# Altium PCB PCB1.PcbDoc
Units mm, origin at the board's own origin, x right, y up, seen from the top; angles counter-clockwise.
Board outline 297.31 x 194.82 mm, 2 copper layers (Top Layer, Bottom Layer); 80 components, 45 nets, 215 pads, 70 vias.
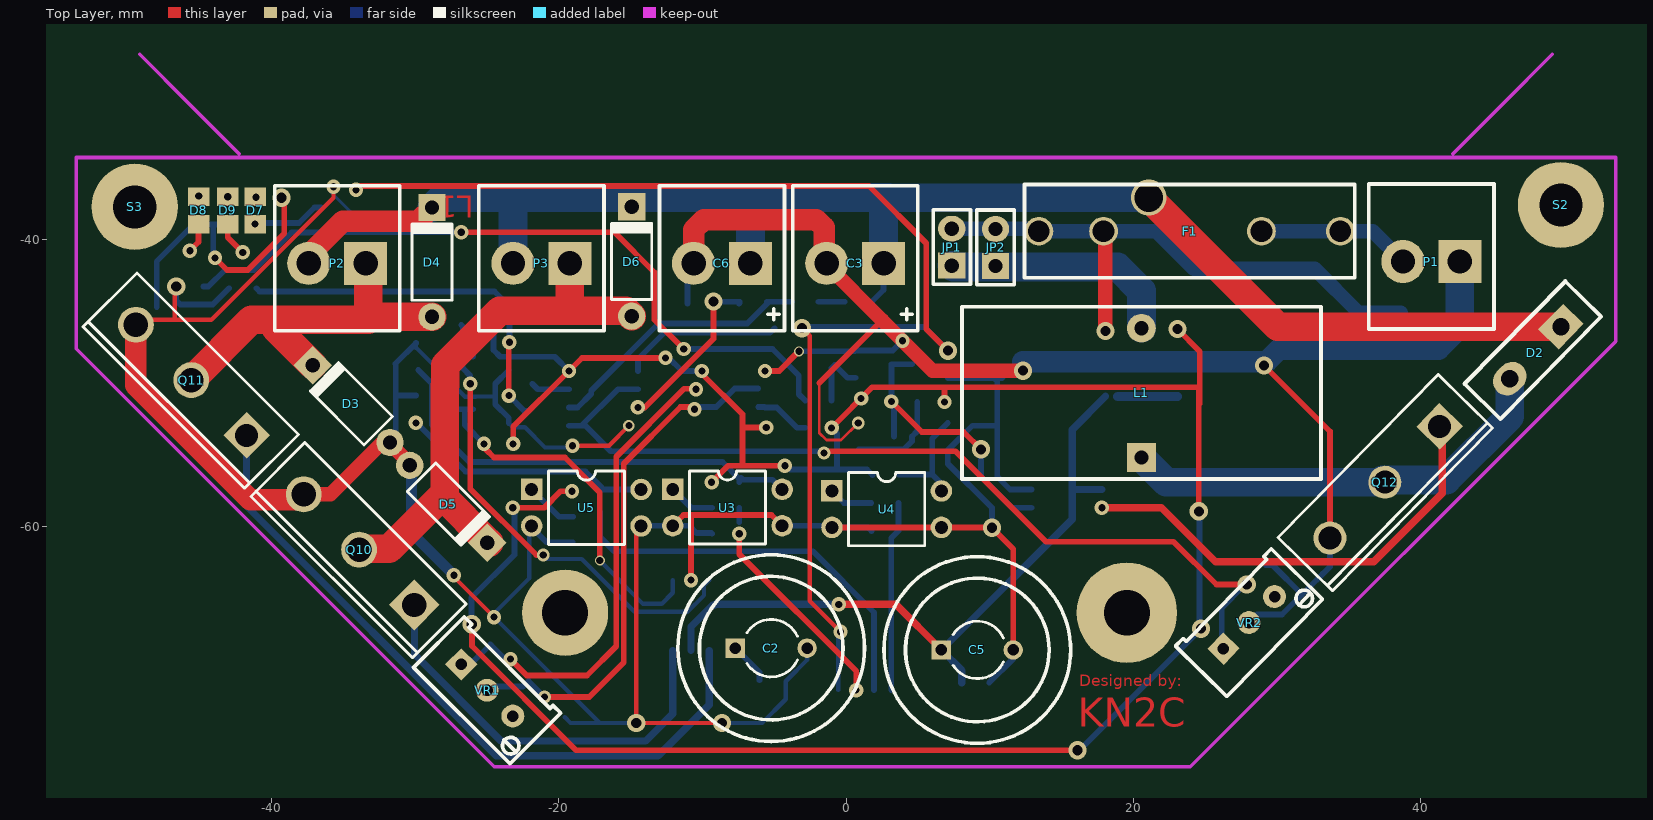
[diagram p0: Top Layer view]
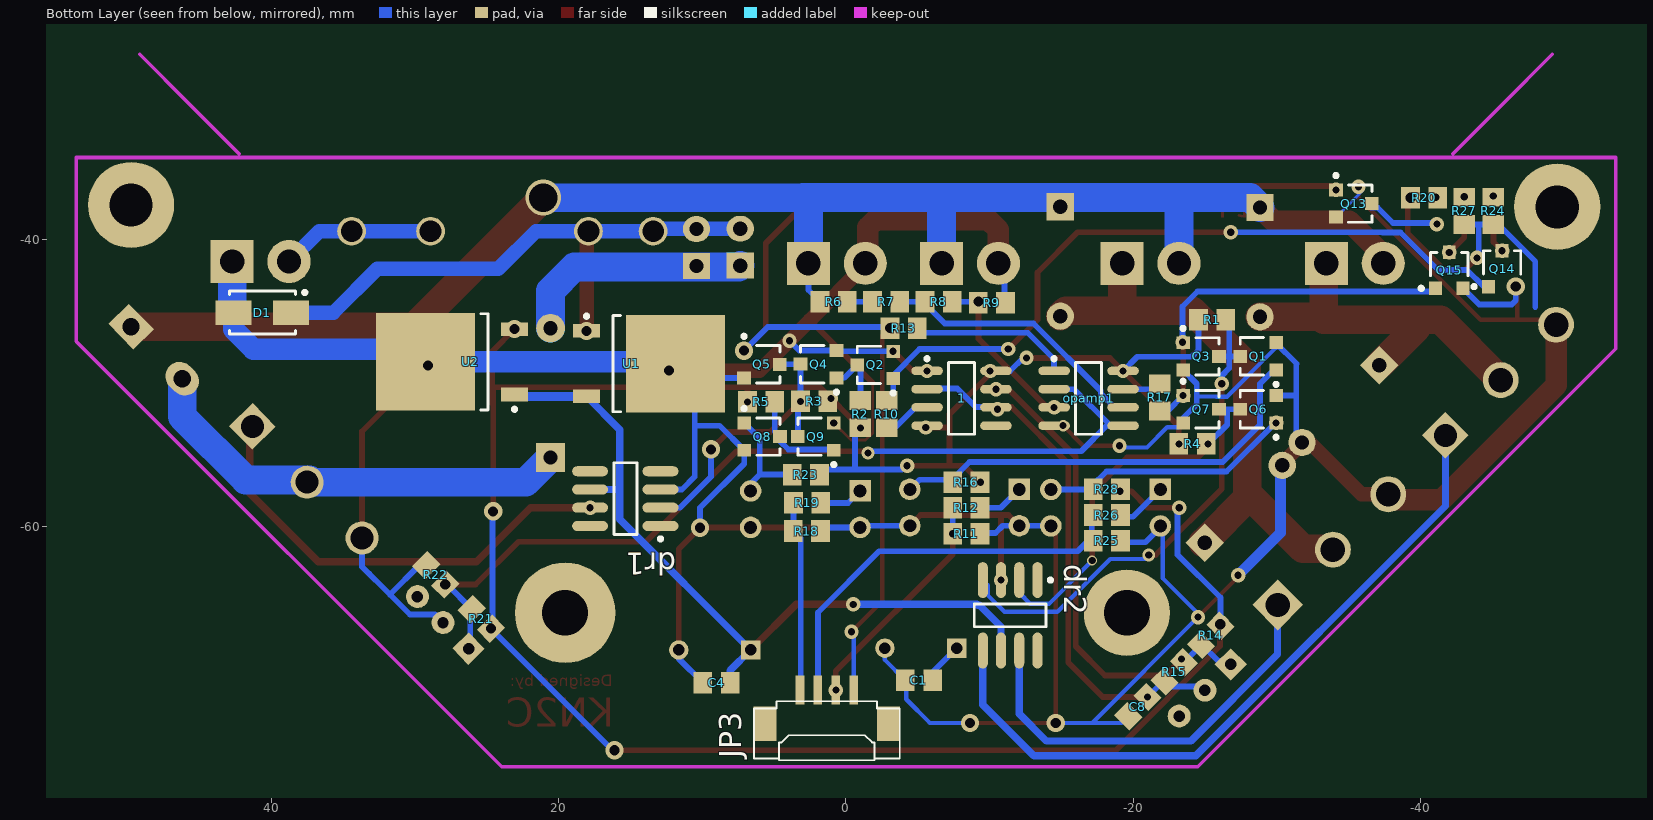
[diagram p1: Bottom Layer view, seen from below]

## Layer stack, top to bottom
Top Layer: signal copper 0.0356
Dielectric: dielectric 0.32, FR-4, Dk 4.8
Bottom Layer: signal copper 0.0356

## Board outline
-204.978,45.593 -200.406,50.165 91.059,50.165 91.059,-140.208 86.614,-144.653 83.947,-141.986 -206.248,-141.986

## Design rules (kind name [scope] priority, off if disabled: settings)
Clearance [All] p1: gap=0.254
FabricationTestpoint [(IsPad And (OnTopLayer Or OnBottomLayer))] p1: side=3 testpointundercomponent=TRUE minsize=1.016 maxsize=2.54 preferedsize=1.524 minholesize=0 maxholesize=1.016 preferedholesize=0.813 testpointgrid=0.025 allowsidetop=TRUE allowsidebottom=TRUE usegrid=TRUE gridtolerance=0
PolygonConnect [All] p1: connectstyle=Relief reliefconductorwidth=0.254 reliefentries=4 polygonreliefangle="90 Angle" airgapwidth=0.254
RoutingVias [All] p1: holewidth=0.711 width=1.27 viastyle="Through Hole" minholewidth=0.5 minwidth=1 maxholewidth=0.711 maxwidth=1.27
SolderMaskExpansion [All] p1: expansion=0.102
Width Width_1 [All] p1: maxlimit=2 minlimit=2539.975 preferedwidth=1 toplayer_minwidth=0 bottomlayer_minwidth=0 minimp=50.000000 maximp=50.000000 favimp=50.000000
27 further rules are at their usual default settings.

## Classes and differential pairs
component class SHOOT1: C1 C2 C3 C4 C5 C6 D1 D2 D3 D4 D5 D6 dr1 dr2 F1 JP1 JP2 JP3 L1 P1 P2 P3 Q1 Q2 Q3 Q4 Q5 Q6 Q7 Q8 Q9 Q10 Q11 Q12 R1 R2 R3 R4 R5 R6 R7 R8 R9 S2 S3 U1 U2
component class SHOOT2: 1 C7 C8 D7 D8 D9 opamp1 Q13 Q14 Q15 R10 R11 R12 R13 R14 R15 R16 R17 R18 R19 R20 R21 R22 R23 R24 R25 R26 R27 R28 U3 U4 U5 VR1 VR2

## Components (designator, comment, footprint, x,y, rotation, side; value= is the part's Value field where it differs from the comment)
1 "555N" "8 pin SOIC_N" -8.044,-51.054 r180 bottom
C1 "Cap_UP" 2012[0805] -5.08,-70.694 r180 bottom
C2 "Cap_El" EL_M -5.207,-68.453 r0 top
C3 "Cap_El_200V" CAP 0.635,-41.656 r270 top
C4 "Cap_UP" 2012[0805] 9.017,-70.866 r180 bottom
C5 "Cap_El" EL_M 9.144,-68.58 r0 top
C6 "Cap_El_200V" CAP -8.636,-41.656 r270 top
C8 "Cap_UP" 2012[0805] -20.32,-72.526 r315 bottom
D1 "Diode" US1M 40.64,-45.085 r180 bottom
D2 "Diode_ShotKey" "TO-220A - duplicate" 48.006,-47.879 r315.48 top
D3 "Diode" DIO10.46-5.3X2.8 -34.447,-51.435 r135 top
D4 "Diode" DIO10.46-5.3X2.8 -28.829,-41.575 r90 top
D5 "Diode" DIO10.46-5.3X2.8 -27.686,-58.42 r315 top
D6 "Diode" DIO10.46-5.3X2.8 -14.924,-41.529 r90 top
D7 "Diode" 2012[0805] -41.148,-37.973 r270 top
D8 "Diode" 2012[0805] -45.085,-37.973 r270 top
D9 "Diode" 2012[0805] -43.053,-37.973 r270 top
dr1 "7667" "8 pin SOIC_M" 15.367,-58.039 r0 bottom
dr2 "7667" "8 pin SOIC_M" -11.43,-66.167 r270 bottom
F1 "Fuse" "fuse new" 35.433,-36.168 r180 top
JP1 "JUMPER" JPR 7.366,-40.513 r90 top
JP2 "JUMPER" JPR 10.414,-40.538 r90 top
JP3 "Header" sucket-smd-4pin 1.27,-73.787 r0 bottom
L1 "Inductor" mh2 20.574,-50.673 r90 top
opamp1 "LM358" "8 pin SOIC_N" -16.891,-51.054 r180 bottom
P1 "Header 2B" BHDR1X2 40.767,-41.529 r270 top
P2 "Header 2B" BHDR1X2 -35.433,-41.656 r270 top
P3 "Header 2B" BHDR1X2 -21.209,-41.656 r270 top
Q1 "2N2222" SOT-23 -28.702,-48.133 r90 bottom
Q2 "2N2222" SOT-23 -2.033,-48.734 r90 bottom
Q3 "2N2222" SOT-23 -24.727,-48.136 r270 bottom
Q4 "2N2222" SOT-23 1.914,-48.679 r90 bottom
Q5 "2N2222" SOT-23 5.851,-48.689 r270 bottom
Q6 "2N2222" SOT-23 -28.702,-51.816 r90 bottom
Q7 "2N2222" SOT-23 -24.727,-51.819 r270 bottom
Q8 "2N2222" SOT-23 5.842,-53.721 r270 bottom
Q9 "2N2222" SOT-23 2.101,-53.721 r90 bottom
Q10 "MOSFET-N" TO247#1 -33.909,-61.595 r135 top
Q11 "MOSFET-N" TO247#2 -45.593,-49.784 r135 top
Q12 "MOSFET-N" TO247#3 37.52,-56.896 r225.48 top
Q13 "2N2222" SOT-23 -35.369,-37.493 r270 bottom
Q14 "2N2222" SOT-23 -45.69,-42.026 r180 bottom
Q15 "2N2222" SOT-23 -42.007,-42.144 r180 bottom
R1 "Res" 2012[0805] -25.493,-45.593 r0 bottom
R2 "Res" 2012[0805] -1.004,-52.163 r270 bottom
R3 "Res" 2012[0805] 2.214,-51.274 r180 bottom
R4 "Res" 2012[0805] -24.13,-54.229 r0 bottom
R5 "Res" 2012[0805] 5.91,-51.308 r0 bottom
R6 "Res" 2012[0805] 0.858,-44.323 r180 bottom
R7 "Res" 2012[0805] -2.794,-44.323 r0 bottom
R8 "Res" 2012[0805] -6.449,-44.323 r0 bottom
R9 "Res" 2012[0805] -10.16,-44.402 r0 bottom
R10 "Res" 2012[0805] -2.837,-52.163 r270 bottom
R11 "Res" 2012[0805] -8.382,-60.492 r180 bottom
R12 "Res" 2012[0805] -8.382,-58.674 r0 bottom
R13 "Res" 2012[0805] -4.011,-46.172 r0 bottom
R14 "Res" 2012[0805] -25.4,-67.564 r135 bottom
R15 "Res" 2012[0805] -22.86,-70.104 r135 bottom
R16 "Res" 2012[0805] -8.382,-56.896 r180 bottom
R17 "Res" 2012[0805] -21.844,-50.989 r90 bottom
R18 "Res" 2012[0805] 2.725,-60.296 r180 bottom
R19 "Res" 2012[0805] 2.704,-58.338 r0 bottom
R20 "Res" 2012[0805] -40.259,-37.084 r0 bottom
R21 "Res" 2012[0805] 25.39,-66.421 r225.48 bottom
R22 "Res" 2012[0805] 28.572,-63.352 r225.48 bottom
R23 "Res" 2012[0805] 2.794,-56.388 r180 bottom
R24 "Res" 2012[0805] -45.085,-37.998 r270 bottom
R25 "Res" 2012[0805] -18.161,-60.96 r180 bottom
R26 "Res" 2012[0805] -18.161,-59.182 r0 bottom
R27 "Res" 2012[0805] -43.053,-37.998 r270 bottom
R28 "Res" 2012[0805] -18.161,-57.404 r180 bottom
S2 "Screw Hole" "Screw Holw 3-6 mm"#1 55.118,-41.021 r180 top
S3 "Screw Hole" "Screw Holw 3-6 mm"#2 -51.308,-39.243 r180 top (schematic designator S2)
U1 "7812" D-PACK 13.716,-48.641 r180 bottom
U2 "7805" D-PACK 27.432,-48.514 r0 bottom
U3 "OptoCoupler" DIP-4 -8.255,-58.661 r270 top
U4 "OptoCoupler" DIP-4 2.831,-58.776 r270 top
U5 "OptoCoupler" DIP-4 -18.077,-58.674 r270 top
VR1 "Res Tap" MULTITURN -24.996,-71.385 r315 top
VR2 "Res Tap" MULTITURN 28.064,-66.675 r45.48 top

## Footprints (in the part's own frame and the unit in brackets; to place one, negate y for a bottom-side part, rotate by r counter-clockwise, add the part's x,y. Pads: shape width x height; smd on the part's side, far side on the other; paste and mask are expansions set on the pad)
"8 pin SOIC_M" [mm] "8-Pin Small Outline Integrated Circuit 1.27 mm Pitch, IPC Low Density"
  oval 2.5x0.7 smd: 1(-2.45,1.905) 2(-2.45,0.635) 3(-2.45,-0.635) 4(-2.45,-1.905) 5(2.45,-1.905) 6(2.45,-0.635) 7(2.45,0.635) 8(2.45,1.905)
  silkscreen extent -2.57,-2.5 0.8,2.93, body extent -2,-2.5 2,2.5, height 1.91
"8 pin SOIC_N" [mm] "8-Pin Small Outline Integrated Circuit 1.27 mm Pitch, IPC Medium Density"
  oval 2.2x0.6 smd: 1(-2.4,1.905) 2(-2.4,0.635) 3(-2.4,-0.635) 4(-2.4,-1.905) 5(2.4,-1.905) 6(2.4,-0.635) 7(2.4,0.635) 8(2.4,1.905)
  silkscreen extent -2.53,-2.5 0.9,2.88, body extent -1.95,-2.45 1.95,2.45, height 1.91
2012[0805] [mm] "Chip Resistor; Body 2.0 x 1.3 mm (LxW typ)"
  rect 1.3x1.5 smd: 1(-0.95,0) 2(0.95,0)
  body extent -1.22,-0.75 1.28,0.75, height 0.5
BHDR1X2 [mm]
  rect 3x3 hole 1.7: 1(0,1.98)
  round 3 hole 1.7: 2(0,-1.98)
  silkscreen extent -5.4,-4.36 4.7,4.36, body extent -5.53,-4.48 4.77,4.47, height 12.5
CAP [mm]
  rect 3x3 hole 1.7: 1(0,1.98)
  round 3 hole 1.7: 2(0,-1.98)
  silkscreen extent -5.4,-4.36 4.7,4.36, body extent -5.53,-4.5 4.82,4.47, height 12.5
D-PACK [mm] "D-PAK, 3-Pads, Body 6.2x6.7mm (max), IPC Medium Density"
  rect 1.9x0.95 smd: 1(-4.35,2.28) 3(-4.35,-2.28)
  rect 6.9x6.8 smd: 4(1.85,0)
  silkscreen extent -4.47,-3.35 -2,3.43, body extent -2.5,-3.35 3.7,3.35, height 2.38
DIO10.46-5.3X2.8 [mm]
  round 1.9 hole 1: 1(-3.81,0)
  rect 1.9x1.9 hole 1: 2(3.81,0)
  silkscreen extent -2.65,-1.4 2.75,1.4, body extent -2.75,-1.5 2.75,1.5, height 3.3
DIP-4 [mm] "DIP; 4 Leads; Row Spacing 7.62 mm; Pitch 2.54 mm"
  rect 1.5x1.5 hole 0.9: 1(-1.27,-3.81)
  round 1.5 hole 0.9: 2(1.27,-3.81) 3(1.27,3.81) 4(-1.27,3.81)
  silkscreen extent -2.55,-2.65 2.55,2.65, body extent -2.65,-2.75 2.68,2.75, height 6.8
EL_M [mm]
  rect 1.35x1.35 hole 0.8: 1(-2.5,0)
  round 1.35 hole 0.8: 2(2.5,0)
  silkscreen extent -6.5,-6.5 6.5,6.5, body extent -6.48,-6.5 6.5,6.5, height 21
"fuse new" [mm]
  round 2 hole 1.5: 0(1,3.25) 1(6.5,3.25) 2(17.5,3.25) 3(22,3.25)
  silkscreen extent 0,0 23,6.5
JPR [mm] "Jumper"
  rect 1.8x1.9 hole 1: 1(-1.3,0)
  oval 1.8x1.9 hole 1: 2(1.27,0)
  silkscreen extent -2.6,-1.3 2.6,1.3, body extent -2.58,-1.3 2.58,1.3, height 9.6
mh2 [mm]
  rect 2x2 hole 1: 1(-4.5,0)
  round 2 hole 1: 2(4.5,0)
  silkscreen extent -6,-12.5 6,12.5, body extent -5.95,-12.45 5.92,12.52, height 4
MULTITURN [mm]
  rect 1.6x1.6 hole 0.8: 1(-2.54,0)
  round 1.6 hole 0.8: 2(0,0) 3(2.54,0)
  silkscreen extent -4.75,-2.5 4.75,2.5, body extent -4.78,-2.5 4.73,2.53, height 4
"Screw Holw 3-6 mm"#1 [mm]
  round 6 hole 3: 0(5.334,-3.429)
"Screw Holw 3-6 mm"#2 [mm]
  round 6 hole 3: 0(-1.778,-1.524)
SOT-23 [mm] "SOT-23; 3 Leads; Body 3.0 x 2.6 mm, inc. leads (LxW max)"
  rect 0.9x0.95 smd: 1(0,1.25) 2(-0.95,-1.25) 3(0.95,-1.25)
  silkscreen extent -2.07,-1.37 1.3,1.25, body extent -1.33,-0.38 1.33,1.25, height 2
sucket-smd-4pin [mm]
  rect 1.6x2.4 smd: 0(-4.238,-0.067) 0(4.362,-0.067)
  rect 0.6x2 smd: 1(-1.813,-2.414) 2(-0.563,-2.414) 3(0.687,-2.414) 4(1.937,-2.414)
  silkscreen extent -5.01,-1.64 5.14,2.48, body extent -5,-2.2 5.15,2.58, height 3.5
TO247#1 [mm] "SIP with Mounting Hole; 3 Leads; Body 20 x 15.6 x 5 mm (typ); Pitch 5.45 mm"
  rect 2.5x2.5 hole 1.7: 1(-5.45,0)
  round 2.5 hole 1.7: 2(0,0) 3(5.45,0)
  silkscreen extent -7.95,-2.6 7.95,2.7
TO247#2 [mm] "SIP with Mounting Hole; 3 Leads; Body 20 x 15.6 x 5 mm (typ); Pitch 5.45 mm"
  rect 2.3x2.3 hole 1.6: 1(-5.45,0)
  round 2.5 hole 1.7: 2(0,0) 3(5.45,0)
  silkscreen extent -7.95,-2.6 7.95,2.7
TO247#3 [mm] "SIP with Mounting Hole; 3 Leads; Body 20 x 15.6 x 5 mm (typ); Pitch 5.45 mm"
  rect 2.3x2.3 hole 1.6: 1(-5.45,0)
  round 2.3 hole 1.6: 2(0,0) 3(5.45,0)
  silkscreen extent -7.95,-2.6 7.95,2.7
"TO-220A - duplicate" [mm]
  rect 2x2.5 hole 1.2: 1(0,2.54)
  oval 2x2.5 hole 1.2: 2(0,-2.54)
  silkscreen extent -2,-5 1.5,5
US1M [mm] "Molded Diode, 2-Leads, Body 4.3x2.6mm, IPC Medium Density"
  rect 2.5x1.7 smd: 1(-2,0) 2(2,0)
  silkscreen extent -2.3,-1.5 3.07,1.52, body extent -2.3,-1.46 2.3,1.46, height 2.3

## Part data
1 opamp1: library part 7667, "Dual MOSFET Driver"
C1 C2 C3 C4 C5 C6 C8: "Capacitor"
D1 D2 D3 D4 D5 D6 D7 D8 D9: "1 Amp General Purpose Rectifier"
dr1 dr2: "Dual MOSFET Driver"
JP3: library part "Header 4", "Header, 4-Pin"
Q1 Q2 Q3 Q4 Q5 Q6 Q7 Q8 Q9 Q13 Q14 Q15: "NPN Bipolar Transistor"
Q10 Q11 Q12: "N-Channel MOSFET"
R1 R2 R3 R4 R5 R6 R7 R8 R9 R10 R11 R12 R13 R14 R15 R16 R17 R18 R19 R20 R21 R22 R23 R24 R25 R26 R27 R28: "Semiconductor Resistor"
U3 U4 U5: library part TLP521
VR1 VR2: "Tapped Resistor"

## Free pads (board coordinates)
  round 7 hole 3.2: 1(19.558,-65.989)
  round 6 hole 3.2: 2(-19.558,-65.989)

## Via types
v1: diameter 1, hole 0.5, Top Layer to Bottom Layer, 44 vias
v2: diameter 1.27, hole 0.7, Top Layer to Bottom Layer, 12 vias
v3: diameter 1.27, hole 0.711, Top Layer to Bottom Layer, 6 vias
v4: diameter 0.9, hole 0.5, Top Layer to Bottom Layer, 4 vias
v5: diameter 0.7, hole 0.5, Top Layer to Bottom Layer, 2 vias
v6: diameter 0.8, hole 0.5, Top Layer to Bottom Layer, 1 vias
v7: diameter 2.5, hole 2, Top Layer to Bottom Layer, 1 vias

## Nets (pads, with @x,y where several pads share a name; then routed paths per layer and width w, separated by ;. In a path a pad name is that pad's centre, name@x,y a point inside that pad or via, vN(x,y) a via of type N, cw(c..) or ccw(c..) an arc to the next point about the centre after c; other vN are vias at no path point)
+12: C4.2 C5.1 dr1.6 dr2.6 U1.3 U2.1 | length 52.5
  Top Layer w0.508: v1(-0.508,-65.405) 3.469,-65.405 C5.1
  Bottom Layer w0.508: dr2.6 -10.795,-66.967 -9.303,-65.475 -9.17,-65.475 -9.1,-65.405 v1(-0.508,-65.405) ; C4.2 8.067,-70.003 C5.1 15.748,-59.476 15.748,-57.404 ; dr1.6 15.748,-57.404 ; U1.3 15.748,-53.239 15.748,-57.404
  Bottom Layer w0.635: U1.3@18.923,-50.921 U2.1@23.082,-50.921
"D1- IN": dr1.2 Q4.1 Q5.1 Q9.1 R3.1 | length 20.5
  Top Layer w0.4: v1(3.164,-51.274) 5.283,-53.393 8.181,-53.393 v2(9.398,-54.61)
  Bottom Layer w0.4: v1(3.164,-51.274) 3.351,-51.461 Q9.1 ; R3.1@3.164,-51.274 Q4.1 3.175,-48.689 Q5.1 ; v2(9.398,-54.61) 9.398,-56.515 11.557,-58.674 dr1.2
D1-OUT: dr1.7 Q12.1 | length 32
  Top Layer w0.508: v1(17.817,-58.674) 21.971,-58.674 25.737,-62.44 36.747,-62.44 41.529,-57.658 41.529,-53.198 Q12.1
"D2- IN": dr2.4 Q1.1 Q3.1 R1.1 | length 34.6
  Top Layer w0.4: v1(-26.162,-50.038) -26.162,-57.371 -21.557,-61.976 v4(-21.082,-61.976)
  Bottom Layer w0.3: v4@-21.049,-62.23 -21.038,-62.241 -18.404,-62.241 -14.72,-65.925 -11.037,-65.925 -9.891,-64.779 -9.891,-64.083 dr2.4
  Bottom Layer w0.4: Q1.1 -27.449,-48.136 -26.688,-48.136 ; R1.1@-26.797,-45.947 -26.688,-46.055 -26.688,-48.068 ; v1(-26.162,-50.038) -26.162,-49.48 -26.688,-48.954 -26.688,-48.136 ; Q3.1 -26.62,-48.136 -26.688,-48.068 ; -26.688,-48.136 -26.688,-48.068
D2-OUT: dr2.5 Q11.1 | length 49.6
  Bottom Layer w0.5: Q11.1 -41.739,-58.563 -24.357,-75.946 -13.081,-75.946 -9.525,-72.39 dr2.5
"D3- IN": dr2.2 Q6.1 Q7.1 R4.1 | length 25.9
  Top Layer w0.4: v1@-25.08,-54.61 -24.507,-55.183 -19.572,-55.183 -17.145,-57.61 v5(-17.145,-62.357)
  Bottom Layer w0.3: v5(-17.145,-62.357) -14.131,-65.371 -12.834,-65.371 -12.065,-64.602 dr2.2 ; v5@-17.018,-62.48 v5@-17.017,-62.48
  Bottom Layer w0.4: Q6.1 -25.98,-51.816 Q7.1 ; -26.543,-51.816 -26.543,-52.893 v1(-25.207,-54.229)
D3-OUT: dr2.7 Q10.1 | length 29.1
  Bottom Layer w0.5: Q10.1 -30.055,-68.878 -24.003,-74.93 -13.97,-74.93 -12.065,-73.025 dr2.7
GND: 1.1 C1.1 C2.2 C3.2 C4.1 C5.2 C6.2 C8.2 D1.1 D3.1 D5.1 dr1.3 dr2.3 opamp1.4 P1.1 Q1.3 Q2.3 Q3.3 Q4.3 Q5.3 Q6.3 Q7.3 Q8.3 Q9.3 Q10.3 Q11.3 Q12.3 Q13.3 Q14.3 Q15.3 R9.1 R11.2 R18.2 R22.1 R25.2 U1.4 U2.4 U3.2 U3.3 U4.2 U4.3 U5.2 U5.3 VR2.2 | length 353.1
  Top Layer w0.2: -1.858,-49.991 -1.858,-53.467 -1.358,-53.967 -0.346,-53.967 v4(0.851,-52.771)
  Top Layer w0.3: Q11.3 -49.109,-45.593 -46.736,-45.593 ; v3(-46.64,-43.276) -46.736,-43.372 -46.736,-45.593 ; v1(-35.687,-36.322) -35.687,-37.084 -44.196,-45.593 -46.736,-45.593 ; v1@-27.368,-63.436 v1(-24.511,-66.294) ; v1(-19.05,-54.356) -16.51,-54.356 v6(-15.113,-52.959) ; U5.3 -14.605,-60.282 v3(-14.605,-73.66) v3(-8.636,-73.66)
  Top Layer w0.4: U3.2 -11.315,-59.182 -5.194,-59.182 U3.3 ; v1(-10.795,-63.717) -10.795,-59.182 ; v1(-5.644,-49.149) -4.648,-49.149 v5(-3.283,-47.784) ; -1.858,-49.991 2.513,-45.62 ; U4.2 U4.3 ; U4.3@6.006,-60.046 U4.3 ; C5.2 11.644,-61.555 v2(10.16,-60.071) 10.033,-60.071 10.008,-60.046 U4.3 ; v2(29.109,-48.768) 33.698,-53.358 Q12.3
  Top Layer w1: Q10.3 -35.897,-57.741 -32.285,-54.129 D3.1 ; D3.1@-31.753,-54.213 D5.1@-30.253,-55.713 ; C3.2 -1.345,-41.762 2.513,-45.62 v1(3.937,-47.044) 6.021,-49.128 v2(12.319,-49.128)
  Top Layer w1.5: Q11.3 -49.447,-50.149 -41.479,-58.116 -38.138,-58.116 Q10.3 ; C6.2 -10.616,-39.323 -9.901,-38.608 -2.076,-38.608 -1.524,-39.16 -1.524,-41.477 C3.2
  Bottom Layer w0.2: v1@-35.964,-36.599 Q13.3
  Bottom Layer w0.3: Q1.3 -29.952,-47.526 -26.536,-50.942 -25.788,-50.942 -25.773,-50.927 -24.431,-50.927 ; v1(-24.511,-66.294) -17.145,-73.66 v3(-14.605,-73.66) -19.186,-73.66 C8.2@-19.578,-73.267 ; v1@-24.511,-66.04 -22.065,-63.594 U5.2@-22.065,-59.863 ; Q7.3 -23.171,-53.075 -22.363,-53.075 -20.955,-54.483 v1@-19.05,-54.483 ; v3@-8.414,-73.66 -5.842,-73.66 -4.191,-72.009 -4.191,-70.755 C1.1 -2.707,-69.271 C2.2
  Bottom Layer w0.4: v3(-46.64,-43.276) -46.64,-44.251 -46.361,-44.53 -44.093,-44.53 Q15.3 ; D3.1 -31.353,-53.729 -31.353,-48.657 -31.369,-48.64 -29.952,-47.223 Q1.3 ; -31.353,-50.8 -31.287,-50.866 Q6.3 ; Q7.3 -23.477,-52.436 -24.431,-51.482 -24.431,-50.927 -24.431,-50.04 Q3.3 ; U5.2@-22.065,-59.863 -20.841,-61.087 R25.2@-19.027,-61.087 ; U5.3 -14.254,-59.931 U3.2 -10.922,-59.931 -10.414,-60.44 -9.384,-60.44 R11.2 ; R9.1@-11.04,-44.45 -11.04,-42.08 C6.2 ; U3.3 -1.729,-59.931 ; v5(-3.283,-47.784) Q4.3@0.609,-47.784 ; U4.2@-1.094,-59.931 U4.2 1.525,-60.046 R18.2 ; Q4.3 3.252,-47.729 v1(3.937,-47.044) ; U4.3@6.641,-60.489 U4.3 ; Q5.3 U1.4@10.287,-49.639 ; C4.1 11.644,-69.189 C5.2 ; v2(10.16,-60.071) 10.16,-58.674 7.092,-55.606 Q8.3 8.804,-52.959 10.541,-52.959 ; U1.4 10.868,-49.639 U1.4@10.287,-49.639 ; dr1.3 11.43,-57.404 10.541,-56.515 10.541,-52.959 ; VR2.2 28.621,-66.118 30.364,-66.118 31.765,-64.717 ; R22.1 29.722,-62.674 31.765,-64.717 ; 33.221,-63.246 33.698,-62.769 ; Q12.3 33.698,-62.769 ; D1.1 D1.1@42.747,-44.978 ; U1.4@10.287,-49.639 10.541,-49.893 10.541,-52.959 ; 31.765,-64.717 33.698,-62.784 33.698,-62.769
  Bottom Layer w0.75: D5.1@-30.253,-55.713 -30.253,-60.425 v1(-27.305,-63.373)
  Bottom Layer w1.5: U1.4@12.319,-48.514 U2.4@29.109,-48.514 ; U2.4 30.171,-47.625 41.276,-47.625 42.64,-46.261 D1.1
  Bottom Layer w2: D1.1@42.747,-44.978 P1.1
"IN AB": opamp1.2 opamp1.5 R21.1 R22.2 VR2.1 | length 62.5
  Top Layer w0.4: v4(-1.524,-54.864) -1.651,-54.737 7.62,-54.737 13.922,-61.039 22.812,-61.039 25.802,-64.029 v2(27.906,-64.029)
  Bottom Layer w0.4: opamp1.5 opamp1.5@-18.415,-52.959 ; opamp1.2 -15.875,-50.419 opamp1.5@-18.415,-52.959 ; v4(-1.524,-54.864) -1.651,-54.737 -16.383,-54.737 -18.161,-52.959 opamp1.5@-18.415,-52.959 ; VR2.1 26.169,-68.372 26.169,-65.856 R21.1 27.771,-64.029 v2(27.906,-64.029)
"MICRO 1": JP3.4 R18.1 R19.2 | length 13.2
  Bottom Layer w0.4: JP3.4@3.145,-71.36 3.145,-60.783 3.654,-60.275 R19.2
"MICRO 2": JP3.2 R11.1 R12.2 | length 15.3
  Top Layer w0.4: v1(-7.432,-60.492) -7.432,-61.91 0.707,-70.049 v1(0.707,-71.373)
  Bottom Layer w0.4: -7.432,-59.694 R12.2
"MICRO 3": JP3.3 R25.1 R26.2 | length 28.4
  Bottom Layer w0.4: R26.2@-17.106,-58.973 -17.106,-59.309 -17.106,-60.738 -16.133,-61.711 -2.297,-61.711 1.957,-65.965 JP3.3
Net1_3: 1.3 R10.2 | length 3.9
  Bottom Layer w0.4: 1.3@-6.109,-51.666 -5.667,-51.666 1.3 -4.826,-51.689 -3.402,-53.113 R10.2
Net1_7: 1.7 R14.1 R15.2 VR1.1 | length 33.6
  Top Layer w0.4: v1(-23.368,-69.215) -23.241,-69.088 -23.26,-69.069 -23.133,-69.069 -23.324,-69.259 -22.225,-70.358 -18.034,-70.358 -16.002,-68.326 -16.002,-55.118 -11.28,-50.396 v1@-10.715,-50.396
  Bottom Layer w0.4: VR1.1@-26.411,-69.335 -25.901,-69.335 R14.1@-24.765,-68.199 ; R14.1 -23.876,-69.088 R15.2@-23.241,-69.088
  other v1: -10.444,-50.419
NetC3_1: C3.1 C6.1 D2.1 D4.2 D6.2 P2.2 P3.2 R6.1 | length 110.4
  Top Layer w1.5: P2.2@-37.309,-41.99 -37.309,-40.992 -35.052,-38.735 -29.799,-38.735 D4.2
  Top Layer w2: v7(21.082,-37.084) 30.066,-46.068 D2.1
  Bottom Layer w0.4: R6.1 2.615,-43.516 C3.1
  Bottom Layer w2: D4.2 -28.132,-37.068 -23.241,-37.068 ; P3.2 -23.189,-37.12 -23.241,-37.068 ; C6.1 -6.656,-37.068 ; C3.1 2.615,-37.437 2.968,-37.084 ; v7(21.082,-37.084) 2.968,-37.084 ; -23.241,-37.068 -6.656,-37.068 ; -6.656,-37.068 2.984,-37.068 2.968,-37.084
NetD2_2: D2.2 L1.1 Q12.2 | length 31.2
  Bottom Layer w2: L1.1 22.297,-56.896 Q12.2 37.361,-56.737 41.815,-56.737 46.225,-52.327 D2.2
NetD3_2: D3.2 D4.1 P2.1 Q11.2 | length 26.1
  Top Layer w2: Q11.2 -41.402,-45.593 -33.274,-45.593 -33.274,-45.385 ; -39.71,-46.172 D3.2 ; P2.1@-33.349,-41.99 P2.1@-33.17,-42.169 ; P2.1@-33.274,-41.835 -33.274,-45.385 ; D4.1 -33.274,-45.385
NetD5_2: D5.2 D6.1 P3.1 Q10.2 | length 39.9
  Top Layer w2: Q10.2 -33.852,-61.538 -31.82,-61.538 -28.124,-57.842 D5.2@-24.865,-61.101 ; -27.94,-58.026 -27.94,-50.165 -27.916,-50.141 -27.916,-48.751 -24.115,-44.95 -19.103,-44.95 ; P3.1 -19.229,-44.824 -19.103,-44.95 ; D6.1 -15.313,-44.95 -19.103,-44.95
  Bottom Layer w1.5: P3.1 P3.1@-18.607,-41.656
NetD7_1: D7.1 R20.1
  other v1: -41.082,-37.059
NetD7_2: D7.2 Q13.1 | length 5.1
  Bottom Layer w0.4: v1(-41.148,-38.923) -41.046,-38.923 -40.974,-38.851 -38.089,-38.851 -37.012,-37.774 Q13.1@-36.567,-37.774
NetD8_1: D8.1 R24.1
  other v1: -45.067,-36.957
NetD8_2: D8.2 Q14.1 | length 2.3
  Top Layer w0.4: v1(-45.69,-40.776) -45.085,-40.171 D8.2
  Bottom Layer w0.3: v1(-45.69,-40.776) Q14.1@-45.69,-40.549
NetD9_1: D9.1 R27.1
  other v1: -43.053,-37.023
NetD9_2: D9.2 Q15.1 | length 2.4
  Top Layer w0.4: D9.2 -43.053,-39.848 v1(-42.007,-40.894)
NetF1_1: F1.0 F1.1 P1.2 | length 10.7
  Bottom Layer w1: F1.1 F1.0 36.676,-39.418 P1.2
NetJP1_1: JP1.1 JP2.1 L1.2 | length 16.5
  Bottom Layer w2: JP1.1 7.463,-41.91 18.923,-41.91 20.574,-43.561 L1.2
Netopamp1_1: opamp1.1 R13.1 | length 11.2
  Bottom Layer w0.4: opamp1.1 -14.491,-48.325 -12.665,-46.499 -5.287,-46.499 R13.1
Netopamp1_7: opamp1.7 R17.2 | length 2.7
  Bottom Layer w0.4: R17.2 -21.464,-50.419 opamp1.7
NetQ2_1: Q2.1 Q4.2 R2.1 | length 4.4
  Bottom Layer w0.4: R2.1 -1.004,-48.955 Q2.1 0.112,-49.629 Q4.2
NetQ8_1: Q8.1 Q9.2 R5.1 | length 6.9
  Bottom Layer w0.4: Q9.2 0.897,-54.625 4.014,-54.625 4.592,-54.047 Q8.1 4.96,-53.353 R5.1
NetR6_2: R6.2 R7.2 | length 1.8
  Bottom Layer w0.4: R7.2@-1.913,-44.323 R6.2
NetR12_1: R12.1 U3.1 | length 3.3
  Bottom Layer w0.4: U3.1 -10.782,-58.674 R12.1
NetR19_1: R19.1 U4.1 | length 3.1
  Bottom Layer w0.4: U4.1 -0.148,-58.338 R19.1
NetR26_1: R26.1 U5.1 | length 3.7
  Bottom Layer w0.4: U5.1 -19.982,-59.309 R26.1@-19,-59.309
OPAMP-IN1: opamp1.3 R8.1 R9.2 | length 11.7
  Top Layer w0.4: v1(-14.491,-51.689) -14.018,-51.689 -9.233,-46.904 v2(-9.233,-44.323)
  Bottom Layer w0.4: R9.2 -9.131,-44.323 R8.1 ; R8.1@-7.443,-44.45 R8.1@-7.403,-44.41
OPAMP-IN2: opamp1.6 R7.1 R8.2 | length 18.8
  Bottom Layer w0.4: opamp1.6 -18.695,-51.689 -17.737,-50.731 -17.737,-50.529 -13.053,-45.845 -6.879,-45.845 -5.499,-44.465 R8.2 R7.1
OPAMP-OUT1: JP3.1 Q5.2 Q13.2 R13.2 | length 86.8
  Top Layer w0.3: v2(-3.061,-46.172) -2.529,-46.704 -2.529,-65.162 v1(-0.381,-67.31)
  Top Layer w0.4: v1@-34.224,-36.268 1.597,-36.268 5.588,-40.259 5.588,-46.226 v2(7.101,-47.739)
  Bottom Layer w0.3: JP3.1 -0.543,-67.472 v1(-0.381,-67.31)
  Bottom Layer w0.4: v2(-3.061,-46.172) -2.979,-46.09 5.452,-46.09 v2(7.101,-47.739)
  other v1: -34.119,-36.543
OPAMP-OUT2: Q3.2 Q7.2 Q15.2 R17.1 | length 27.2
  Top Layer w0.4: v1(-23.477,-50.869) -23.477,-47.253 -23.439,-47.215 v1(-23.439,-47.148)
  Bottom Layer w0.4: Q15.2 -40.841,-43.61 -24.484,-43.61 -23.439,-44.655 Q3.2@-23.439,-47.402 ; Q7.2@-23.477,-50.653 v1(-23.477,-50.869) -22.407,-51.939 -22.098,-51.939 R17.1@-21.844,-51.685 ; Q3.2@-23.439,-47.215 -23.477,-47.253 Q3.2 v1(-23.439,-47.148)
PIN6: 1.2 1.6 C8.1 R15.1 VR1.2 | length 37.3
  Top Layer w0.4: v4(-20.992,-71.854) -17.879,-71.854 -15.475,-69.45 -15.475,-55.607 -11.534,-51.666 -10.702,-51.666 v1(-10.552,-51.816)
  Bottom Layer w0.4: VR1.2@-24.615,-71.131 -22.494,-71.131 -22.1,-70.737 -20.918,-71.919 C8.1@-20.751,-71.753 ; v1(-10.552,-51.816) -10.759,-51.816 -10.909,-51.666 -9.034,-51.666 -7.747,-50.379 1.2@-6.126,-50.379
"PULS 555": Q2.2 Q14.2 R10.1 | length 51.7
  Top Layer w0.4: v1(-26.797,-39.497) -16.129,-39.497 -13.335,-42.291 -13.335,-45.593 -11.367,-47.561 -10.986,-47.561 -11.049,-47.625 v1(-11.303,-47.625)
  Bottom Layer w0.4: Q14.2 -44.406,-43.276 -43.247,-42.117 -41.228,-42.117 -38.616,-39.505 -37.373,-39.505 -37.365,-39.497 v1(-26.797,-39.497) ; v1(-11.303,-47.625) -5.124,-47.625 -3.283,-49.466 Q2.2 -3.283,-50.767 R10.1
"PULS OPTO 1": Q8.2 R23.1 U4.4 | length 8.5
  Bottom Layer w0.4: R23.1@3.654,-56.358 6.006,-56.358 ; U4.4@6.156,-57.425 U4.4@6.641,-56.941 ; U4.4@6.664,-57.483 6.664,-57.016 6.006,-56.358 ; Q8.2 6.006,-53.857 6.006,-56.358
"PULS OPTO 2": Q1.2 R16.1 U3.4 | length 30.7
  Bottom Layer w0.4: Q1.2@-29.787,-49.086 -28.829,-50.044 -28.829,-52.903 -26.233,-55.499 -8.606,-55.499 -7.432,-56.673 R16.1 ; R16.1@-7.305,-56.582 -7.305,-56.725 -5.112,-56.725 U3.4
"PULS OPTO 3": Q6.2 R28.1 U5.4 | length 18.1
  Bottom Layer w0.4: v1(-29.952,-52.766) -29.716,-52.766 -29.716,-52.94 -26.504,-56.153 -18.134,-56.153 -17.152,-57.135 R28.1@-17.152,-57.277 ; R28.1@-17.106,-57.177 -16.88,-57.404 -14.743,-57.404 U5.4@-14.204,-57.944
VCC: 1.4 1.8 C1.2 C2.1 opamp1.8 R1.2 R2.2 R3.2 R4.2 R5.2 R14.2 R16.2 R20.2 R21.2 R23.2 R24.2 R27.2 R28.2 U2.3 | length 194.2
  Top Layer w0.4: v1(-43.942,-41.275) -43.1,-42.117 -41.656,-42.117 -39.116,-39.577 -39.116,-37.277 v3(-39.309,-37.084) ; v3@-26.051,-66.871 -26.051,-68.31 -18.796,-75.565 v3@16.258,-75.565 ; v1(-23.21,-58.674) -21.015,-58.674 -19.872,-57.531 v1(-19.081,-57.531) ; v1(-23.18,-54.229) -23.18,-53.038 v1(-19.291,-49.149) -18.383,-48.241 v1(-12.573,-48.241) ; v1(-10.033,-49.149) -10.033,-49.354 -7.214,-52.172 -7.214,-53.086 ; v1(-9.361,-56.896) -8.218,-55.753 -7.239,-55.753 ; v1(-5.551,-53.086) -7.214,-53.086 ; v1(-4.258,-55.753) -7.239,-55.753 ; v1(-1.004,-53.113) 1.817,-50.292 24.569,-50.292 v2(24.569,-58.928) ; 6.858,-50.292 6.86,-50.294 ; v1(6.86,-51.308) 6.86,-50.292 ; v2(23.082,-46.234) 24.638,-47.79 24.638,-51.435 ; v2@24.698,-67.125 v2(24.724,-67.098) ; -7.239,-55.753 -7.214,-55.728 -7.214,-53.086
  Bottom Layer w0.4: -48.006,-44.704 -48.006,-41.525 -45.429,-38.948 R24.2 -44.069,-38.948 ; v1(-43.942,-41.275) -44.069,-41.148 -44.069,-38.948 ; R27.2 -44.069,-38.948 ; R14.2 -26.072,-64.934 -23.091,-61.953 v1@-23.091,-58.794 ; R1.2 -24.543,-47.687 -24.073,-48.157 -20.283,-48.157 v1(-19.291,-49.149) ; v1(-12.573,-48.241) -12.338,-48.241 -11.43,-49.149 1.8 ; C2.1 -6.03,-70.13 C1.2 ; v1@-3.899,-56.007 -0.62,-56.007 ; v1(-1.004,-53.113) -0.62,-53.498 -0.62,-56.007 ; R23.2 1.463,-56.007 -0.62,-56.007 ; v3(16.129,-75.565) 16.258,-75.565 v2(24.724,-67.098) 24.612,-66.986 24.612,-59.563
  other v1: 1.055,-51.065
  other v3: -26.057,-66.789
VSS: D1.2 F1.2 F1.3 JP1.2 JP2.2 U1.1 | length 45.2
  Top Layer w1: F1.2 18.066,-39.551 v2(18.066,-46.361)
  Bottom Layer w1: JP1.2 13.258,-39.243 F1.3 ; D1.2 35.687,-45.085 32.639,-42.037 24.209,-42.037 21.59,-39.418 F1.2 ; F1.3 F1.2 ; F1.3 F1.2
pads on no net: 1.5 dr1.1 dr1.4 dr1.5 dr1.8 dr2.1 dr2.8 JP3.0 S2.0 S3.0 VR1.3 VR2.3

## Keep-outs
Keep-Out Layer:
  lines w0.254: -49.185,-27.105 -45.72,-30.571 -42.255,-34.036 ; 42.255,-34.036 45.72,-30.571 49.185,-27.105 ; -53.594,-47.601 -24.487,-76.708 23.979,-76.708 53.594,-47.093 53.594,-34.29 -53.594,-34.29 -53.594,-47.601

## Other copper
Top Layer:
  text "L1" at -25.908,-36.957 h1.52 r180
  text "Designed by:" at 16.256,-71.12 h0.8
  text "KN2C" at 16.129,-73.914 h2